# Altium PCB HEXPAD1.PcbDoc
Units mm, origin at the board's own origin, x right, y up, seen from the top; angles counter-clockwise.
Board outline 168.1 x 142.58 mm, 2 copper layers (Top Layer, Bottom Layer), stack 1.74 mm thick; 20 components, 21 nets, 74 pads, 7 vias.
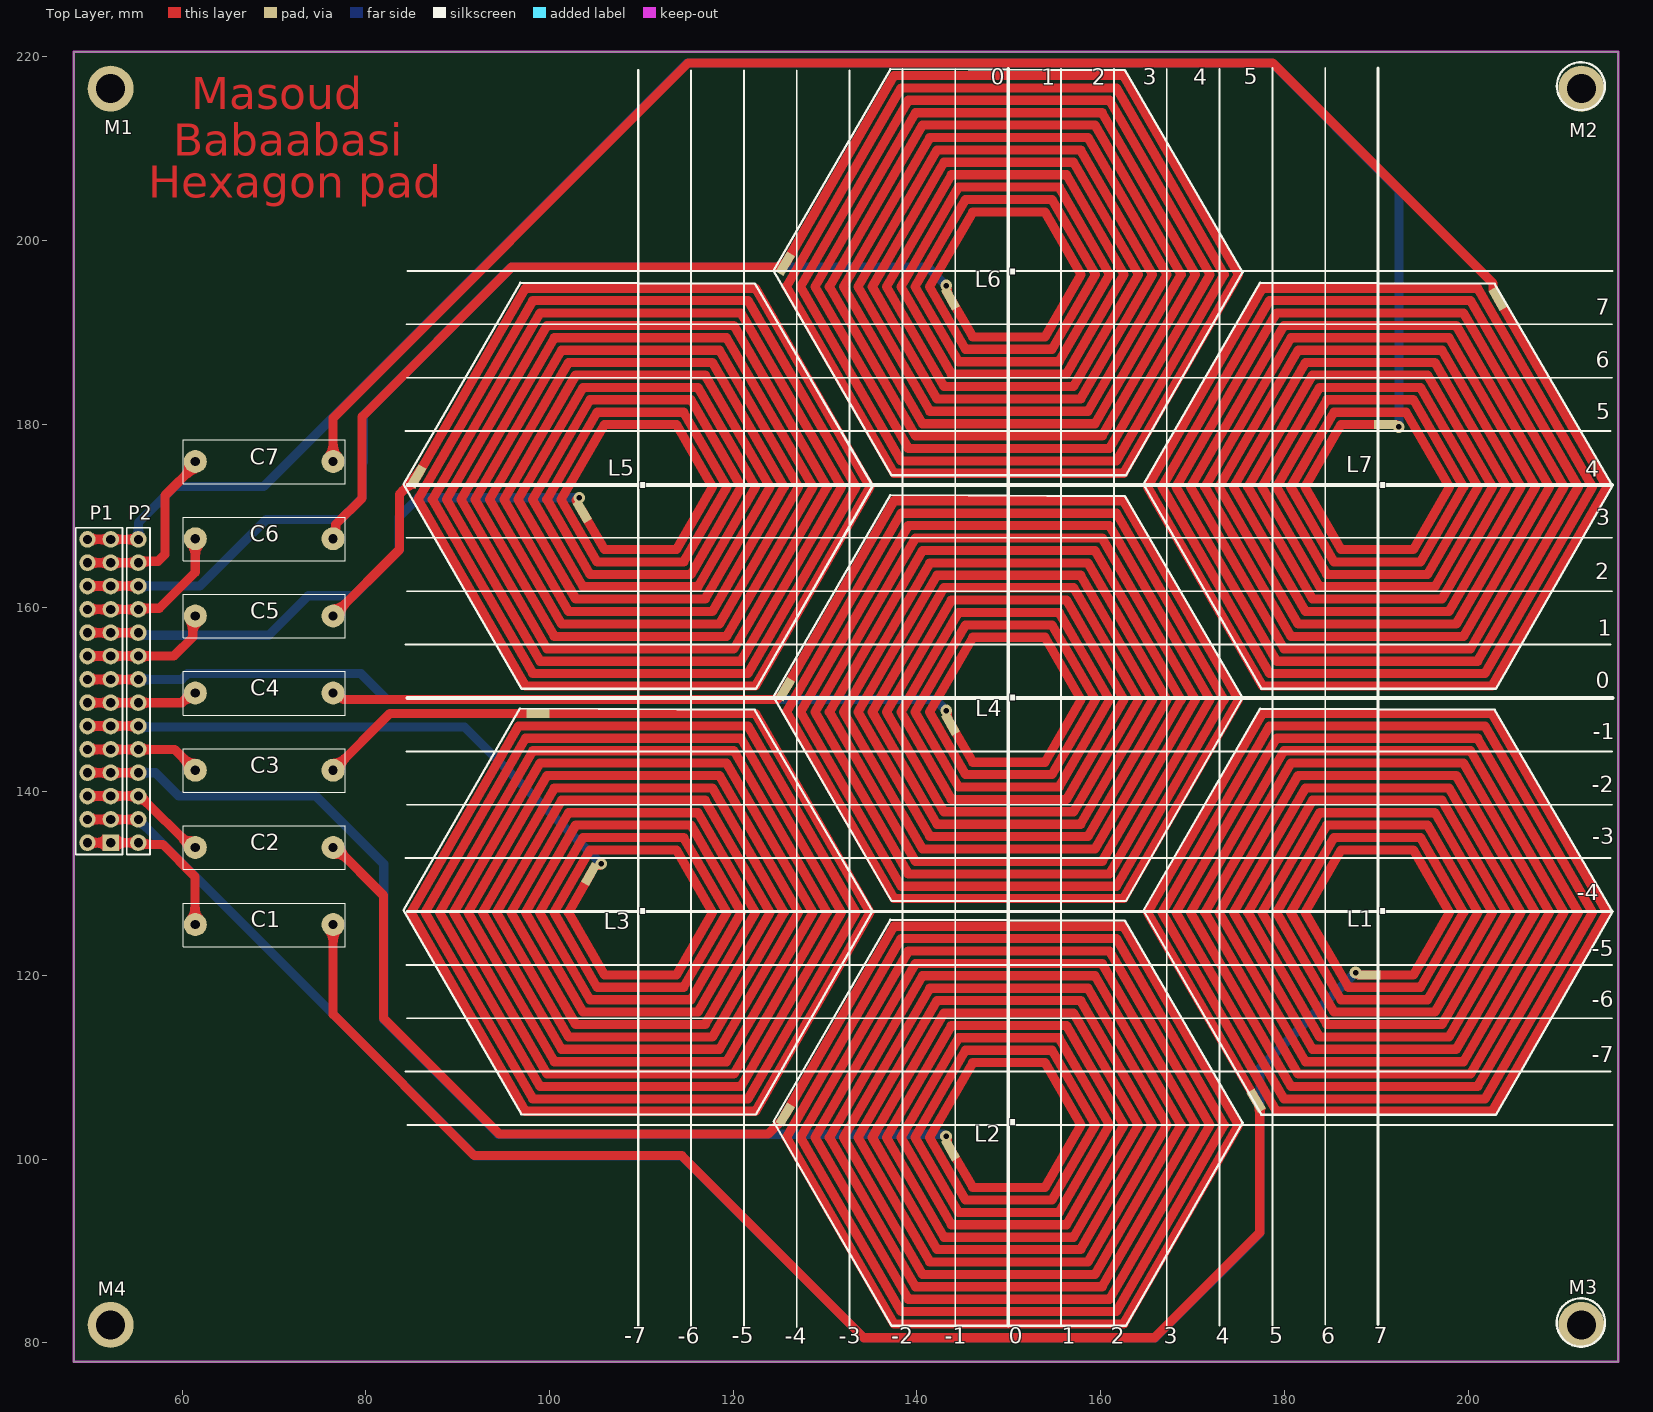
[diagram p0: Top Layer view]
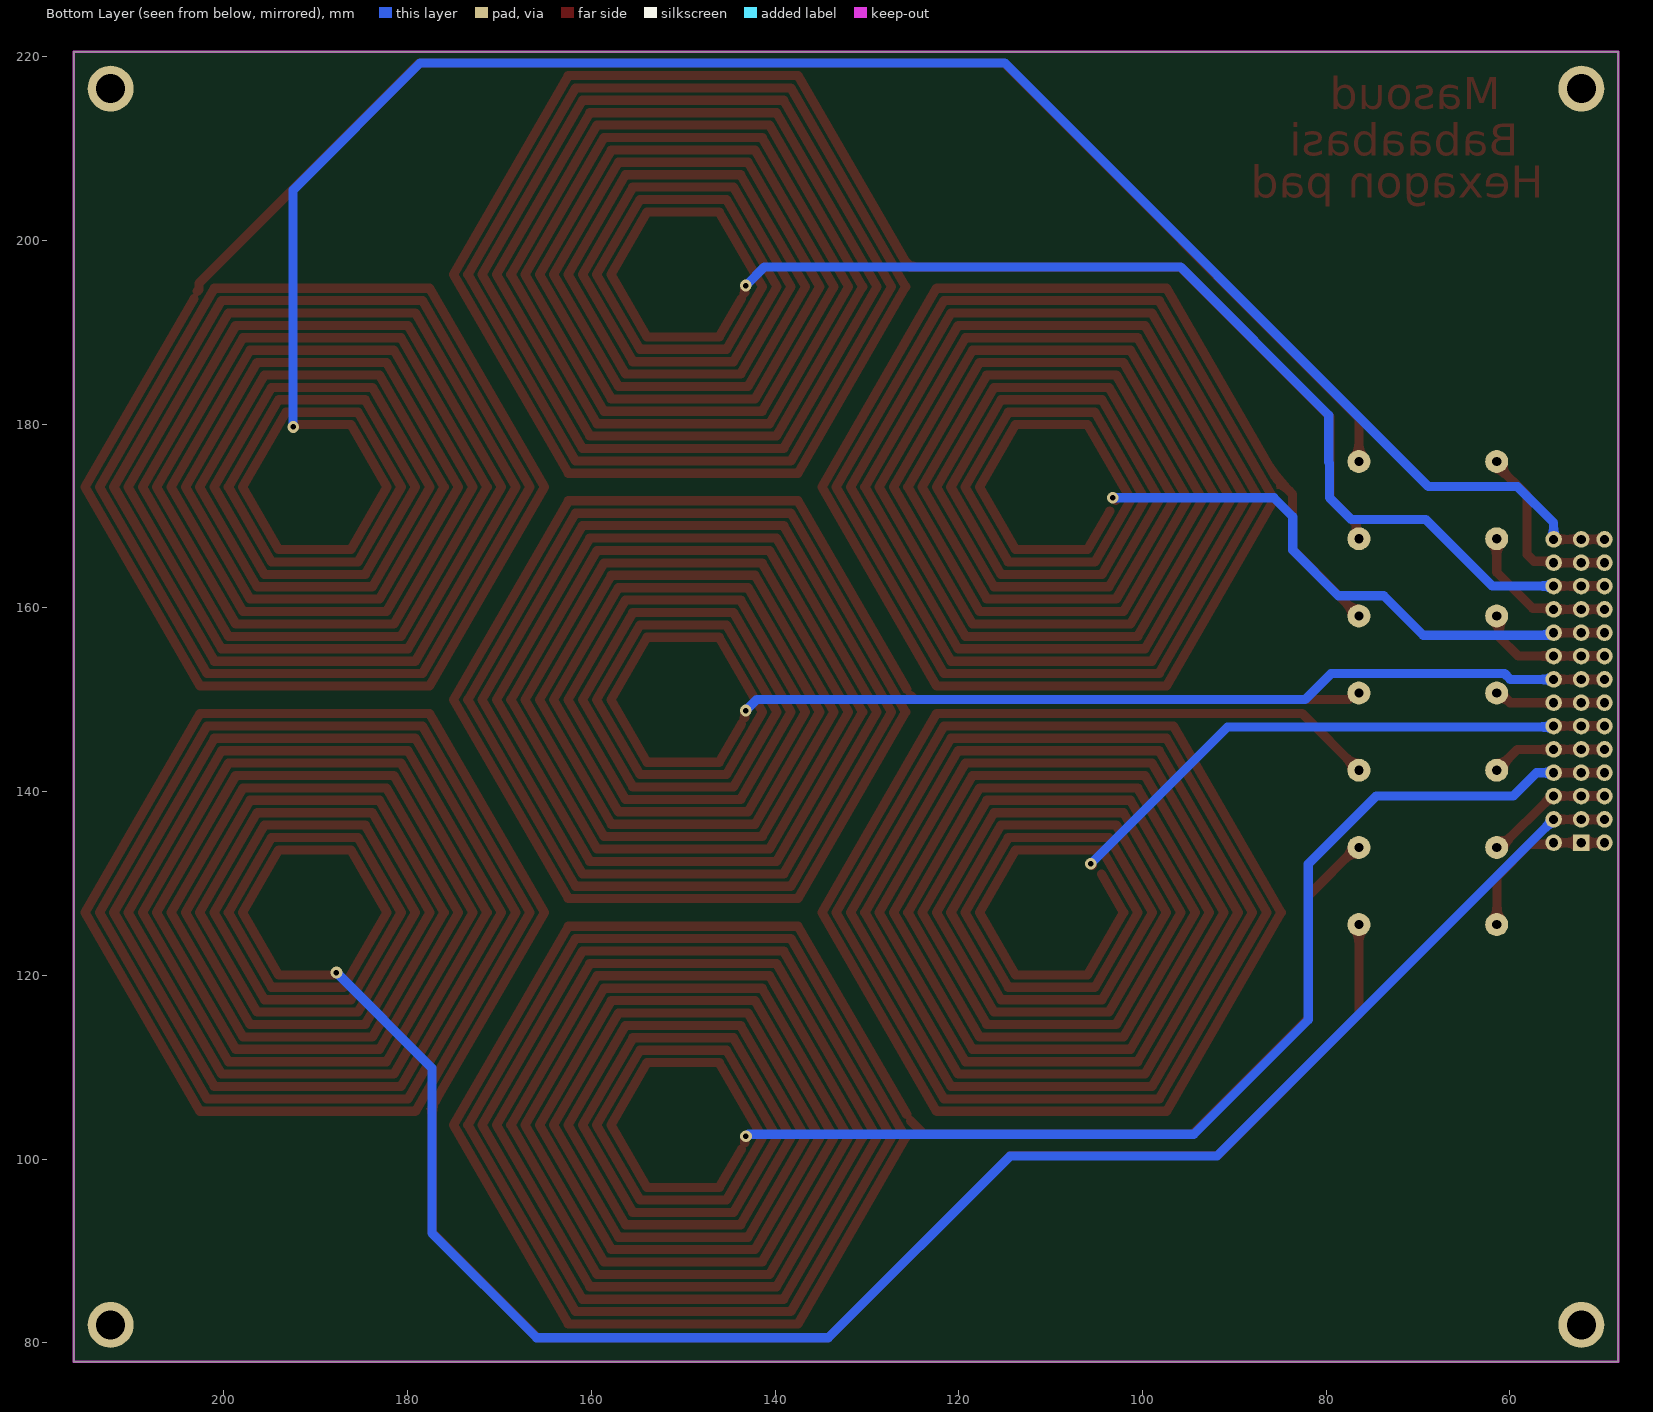
[diagram p1: Bottom Layer view, seen from below]

## Layer stack, top to bottom
Top Solder: solder mask 0.0102, Solder Resist, Dk 3.5
Top Layer: signal copper 0.07
Dielectric 1: dielectric 1.6, FR-4, Dk 4.8
Bottom Layer: signal copper 0.07
Bottom Solder: solder mask 0.0102, Solder Resist, Dk 3.5

## Board outline
48.225,77.95 48.225,220.525 216.325,220.525 216.325,77.95

## Design rules (kind name [scope] priority, off if disabled: settings)
Clearance [All] p1: gap=0.35 ignorepadtopadclearanceinfootprint=FALSE except(0: Arc-Hole Track-Hole SMDPad-Hole THPad-Hole Via-Hole Fill-Hole Poly-Hole Region-Hole Text-Hole; 0.254: Text-Text)
PolygonConnect [All] p1: connectstyle=Relief reliefconductorwidth=0.254 reliefentries=4 polygonreliefangle="90 Angle" airgapwidth=0.254
RoomDefinition HEX1 [InComponentClass('HEX1')] p1 off: confinementstyle=ConfineIn formatcopy=TRUE lockcomponents=FALSE outline 296.865,83.775 354.65,83.775 354.65,137.877 296.865,137.877
RoutingVias [All] p1: holewidth=0.711 width=1.27 viastyle="Through Hole" minholewidth=0.6 minwidth=1.27 maxholewidth=1 maxwidth=22
SolderMaskExpansion [All] p1: expansion=0.102 istentingtop=FALSE
Width [All] p1: maxlimit=2 minlimit=0.254 preferedwidth=1
30 further rules are at their usual default settings.

## Components (designator, comment, footprint, x,y, rotation, side; value= is the part's Value field where it differs from the comment)
C1 "Cap" CAP_MKT 61.45,125.525 r0 top value=100pF
C2 "Cap" CAP_MKT 61.45,133.925 r0 top value=100pF
C3 "Cap" CAP_MKT 61.45,142.325 r0 top value=100pF
C4 "Cap" CAP_MKT 61.45,150.725 r0 top value=100pF
C5 "Cap" CAP_MKT 61.45,159.125 r0 top value=100pF
C6 "Cap" CAP_MKT 61.45,167.525 r0 top value=100pF
C7 "Cap" CAP_MKT 61.45,175.925 r0 top value=100pF
L1 "Inductor" HEXAGON_50-15 190.098,126.85 r120 top locked net-tie value=8uH
L2 "Inductor" HEXAGON_50-15 150,103.699 r60 top locked net-tie value=8uH
L3 "Inductor" HEXAGON_50-15 109.902,126.85 r0 top locked net-tie value=8uH
L4 "Inductor" HEXAGON_50-15 150,150 r60 top locked net-tie value=8uH
L5 "Inductor" HEXAGON_50-15 109.902,173.15 r60 top locked net-tie value=8uH
L6 "Inductor" HEXAGON_50-15 150,196.301 r60 top locked net-tie value=8uH
L7 "Inductor" HEXAGON_50-15 190.098,173.15 r300 top locked net-tie value=8uH
M1 "Screw" "BOARD SCREW 1"#1 52.225,216.525 r0 top
M2 "Screw" "BOARD SCREW 1"#1 212.325,216.525 r0 top
M3 "Screw" "BOARD SCREW 1"#1 212.325,81.95 r0 top
M4 "Screw" "BOARD SCREW 1"#2 52.225,81.95 r0 top
P1 "Header 14X2" HDR2X14 52.25,134.435 r90 top
P2 "Header 14" HDR1X14 55.25,134.435 r90 top

## Footprints (in the part's own frame and the unit in brackets; to place one, negate y for a bottom-side part, rotate by r counter-clockwise, add the part's x,y. Pads: shape width x height; smd on the part's side, far side on the other; paste and mask are expansions set on the pad)
"BOARD SCREW 1"#1 [mm]
  round 5 hole 3.15 mask+0.1: S(0,0)
  body extent -2.67,-2.64 2.69,2.72, height 2.34
"BOARD SCREW 1"#2 [mm]
  round 5 hole 3.15 mask+0.1: *(0,0)
  body extent -2.67,-2.64 2.69,2.72, height 2.34
CAP_MKT [mm]
  round 2.5 hole 1: 1(0,0) 2(15,0)
  silkscreen extent -1.29,-2.4 16.3,2.35
HDR1X14 [mm] "Connector; Header; 14 Position"
  round 1.8 hole 1: 1(0,0) 2(2.54,0) 3(5.08,0) 4(7.62,0) 5(10.16,0) 6(12.7,0) 7(15.24,0) 8(17.78,0) 9(20.32,0) 10(22.86,0) 11(25.4,0) 12(27.94,0) 13(30.48,0) 14(33.02,0)
  silkscreen extent -1.27,-1.27 34.29,1.27
HDR2X14 [mm] "Connector; Header; 14x2 Position"
  rect 1.8x1.8 hole 1: 1(0,0)
  round 1.8 hole 1: 2(0,2.54) 3(2.54,0) 4(2.54,2.54) 5(5.08,0) 6(5.08,2.54) 7(7.62,0) 8(7.62,2.54) 9(10.16,0) 10(10.16,2.54) 11(12.7,0) 12(12.7,2.54) 13(15.24,0) 14(15.24,2.54) 15(17.78,0) 16(17.78,2.54) 17(20.32,0) 18(20.32,2.54) 19(22.86,0) 20(22.86,2.54) 21(25.4,0) 22(25.4,2.54) 23(27.94,0) 24(27.94,2.54) 25(30.48,0) 26(30.48,2.54) 27(33.02,0) 28(33.02,2.54)
  silkscreen extent -1.27,-1.27 34.29,3.81
HEXAGON_50-15 [mm]
  rect 2.5x1 smd mask+0.102: 1(-11.176,21.651)
  rect 2.5x1 smd rot 60 mask+0.102: 2(-5.44,4.179)
  Top Layer lines w1: -11.176,21.651 12.5,21.651 25,0 12.5,-21.651 -12.5,-21.651 -25,0 -13.279,20.301 11.721,20.301 23.441,0 11.721,-20.301 -11.721,-20.301 -23.441,0 -12.5,18.951 10.941,18.951 21.882,0 10.941,-18.951 -10.941,-18.951 -21.882,0 -11.721,17.601 10.162,17.601 20.323,0 10.162,-17.601 -10.162,-17.601 -20.323,0 -10.941,16.251 9.382,16.251 18.765,0 9.382,-16.251 -9.382,-16.251 -18.765,0 -10.162,14.901 8.603,14.901 17.206,0 8.603,-14.901 -8.603,-14.901 -17.206,0 -9.382,13.551 7.823,13.551 15.647,0 7.823,-13.551 -7.823,-13.551 -15.647,0 -8.603,12.201 7.044,12.201 14.088,0 7.044,-12.201 -7.044,-12.201 -14.088,0 -7.823,10.851 6.265,10.851 12.529,0 6.265,-10.851 -6.265,-10.851 -12.529,0 -7.044,9.501 5.485,9.501 10.97,0 5.485,-9.501 -5.485,-9.501 -10.97,0 -6.265,8.151 4.706,8.151 9.412,0 4.706,-8.151 -4.706,-8.151 -9.412,0 -5.485,6.801 3.926,6.801 7.853,0 3.926,-6.801 -3.926,-6.801 -7.853,0 -5.44,4.179

## Part data
C1 C2 C3 C4 C5 C6 C7: "Capacitor", LatestRevisionDate=17-Jul-2002, LatestRevisionNote="Re-released for DXP Platform.", PackageDescription="Radial Cap, Thru-Hole; 2 Leads; 0.3 in Pin Spacing", PackageReference=RAD-0.3, Published=8-Jun-2000, Publisher="Altium Limited"
M1 M2 M3 M4: library part "Board Screw", "Board Screw With Spacer"
P1: "Header, 14-Pin, Dual row", LatestRevisionDate=17-Jul-2002, LatestRevisionNote="Re-released for DXP Platform.", Publisher="Altium Limited"
P2: "Header, 14-Pin", LatestRevisionDate=17-Jul-2002, LatestRevisionNote="Re-released for DXP Platform.", Publisher="Altium Limited"
L1 L2 L3 L4 L5 L6 L7: Code_IEC=1005, Code_JEITA=0402, LatestRevisionDate=29-May-2009, LatestRevisionNote="IPC-7351 Footprint Added.", PackageDescription="Chip Inductor", PackageReference=0402-A, Published=8-Jun-2000, Publisher="Altium Limited"

## Via types
v1: diameter 1.27, hole 0.6, Top Layer to Bottom Layer, tented both sides, 7 vias

## Nets (pads, with @x,y where several pads share a name; then routed paths per layer and width w, separated by ;. In a path a pad name is that pad's centre, name@x,y a point inside that pad or via, vN(x,y) a via of type N, cw(c..) or ccw(c..) an arc to the next point about the centre after c; other vN are vias at no path point)
NetC1_1: C1.1 P1.1 P1.2 P2.1 | length 18.5
  Top Layer w1: P1.2 P1.1 P2.1 55.403,134.282 55.969,134.282 55.994,134.257 57.893,134.257 61.41,130.74 61.41,125.565 C1.1
NetC1_2: C1.2 L1.1 | length 143.6
  Top Layer w1: C1.2 76.45,115.75 91.825,100.375 114.4,100.375 134.225,80.55 165.85,80.55 177.311,92.011 L1.1@177.311,105.65
NetC2_1: C2.1 P1.5 P1.6 P2.3 | length 14.1
  Top Layer w1: P1.6 P1.5 P2.3 55.466,139.515 61.056,133.925 C2.1
NetC2_2: C2.2 L2.1 | length 70.2
  Top Layer w1: C2.2 76.7,133.925 81.925,128.7 81.925,115.325 94.525,102.725 123.8,102.725 L2.1@125.25,104.175
NetC3_1: C3.1 P1.9 P1.10 P2.5 | length 12.7
  Top Layer w1: P1.10 P1.9 P2.5 59.18,144.595 C3.1
NetC3_2: C3.2 L3.1 | length 24.8
  Top Layer w1: C3.2 82.626,148.501 L3.1
NetC4_1: C4.1 P1.13 P1.14 P2.7 | length 12.2
  Top Layer w1: P1.14 P1.13 P2.7 59.994,149.675 61.044,150.725 C4.1
NetC4_2: C4.2 L4.1 | length 49.3
  Top Layer w1: C4.2 76.856,150.725 77.556,150.025 124.8,150.025 L4.1@125.25,150.475
NetC5_1: C5.1 P1.17 P1.18 P2.9 | length 14.7
  Top Layer w1: P1.18 P1.17 P2.9 59.105,154.755 61.163,156.813 61.163,158.838 C5.1
NetC5_2: C5.2 L5.1 | length 18.7
  Top Layer w1: C5.2 83.675,166.35 83.675,172.375 84.764,173.464 84.799,173.464 85.425,174.09 L5.1@85.425,174.125
NetC6_1: C6.1 P1.21 P1.22 P2.11 | length 17.1
  Top Layer w1: P1.22 P1.21 P2.11 55.365,159.95 57.525,159.95 61.45,163.875 C6.1
NetC6_2: C6.2 L6.1 | length 67.5
  Top Layer w1: C6.2 76.737,167.812 76.737,169.087 79.6,171.95 79.6,180.8 95.873,197.073 125.287,197.073 L6.1
NetC7_1: C7.1 P1.25 P1.26 P2.13 | length 20.3
  Top Layer w1: P1.26 P1.25 P2.13 55.403,165.068 57.393,165.068 58.15,165.825 58.15,172.225 61.45,175.525 C7.1
NetC7_2: C7.2 L7.1 | length 157.9
  Top Layer w1: C7.2 76.45,180.675 115.1,219.325 178.7,219.325 202.702,195.323 202.702,194.645 L7.1@202.885,194.462
NetL1_2: L1.2 P1.3 P1.4 P2.2 | length 190
  Top Layer w1: P1.4 P1.3 P2.2 ; v1(187.737,120.308) 187.81,120.308 188.069,120.049 L1.2
  Bottom Layer w1: P2.2 91.9,100.325 114.425,100.325 134.2,80.55 165.95,80.55 177.35,91.95 177.35,109.922 v1(187.737,120.308)
NetL2_2: L2.2 P1.7 P1.8 P2.4 | length 120.5
  Top Layer w1: P1.8 P1.7 P2.4 ; v1(143.161,102.486) 143.161,102.413 143.286,102.288 L2.2@143.286,101.775
  Bottom Layer w1: P2.4 57.12,142.055 59.65,139.525 74.55,139.525 81.95,132.125 81.95,115.175 94.425,102.7 142.874,102.7 143.088,102.486 v1(143.161,102.486)
NetL3_2: L3.2 P1.11 P1.12 P2.6 | length 62.4
  Top Layer w1: P1.12 P1.11 P2.6 ; v1@105.43,131.97 v1(105.625,132.166)
  Bottom Layer w1: P2.6 55.36,147.025 90.766,147.025 v1(105.625,132.166)
NetL4_2: L4.2 P1.15 P1.16 P2.8 | length 96.3
  Top Layer w1: P1.16 P1.15 P2.8 ; v1(143.184,148.826) 143.184,148.753 143.286,148.652 143.286,148.064 L4.2@143.35,148
  Bottom Layer w1: P2.8 59.97,152.215 60.605,152.85 79.475,152.85 82.3,150.025 141.986,150.025 v1(143.184,148.826)
NetL5_2: L5.2 P1.19 P1.20 P2.10 | length 62.4
  Top Layer w1: P1.20 P1.19 P2.10 ; v1@102.91,171.71 103.177,171.977 v1(103.238,171.977)
  Bottom Layer w1: P2.10 55.403,157.142 55.969,157.142 56.086,157.025 69.45,157.025 73.75,161.325 78.675,161.325 83.65,166.3 83.65,169.925 85.702,171.977 v1(103.238,171.977)
NetL6_2: L6.2 P1.23 P1.24 P2.12 | length 114.8
  Top Layer w1: P1.24 P1.23 P2.12 ; v1(143.175,195.083) 143.227,195.031 143.227,194.748 143.286,194.689 143.286,194.339 L6.2@143.375,194.25
  Bottom Layer w1: P2.12 61.925,162.375 69.175,169.625 77.275,169.625 79.65,172 79.65,175.8 79.725,175.875 79.725,180.975 95.85,197.1 141.158,197.1 v1(143.175,195.083)
NetL7_2: L7.2 P1.27 P1.28 P2.14 | length 198.4
  Top Layer w1: P1.28 P1.27 P2.14 ; L7.2 192.127,179.951 192.386,179.692 v1(192.459,179.692)
  Bottom Layer w1: P2.14 55.25,169.275 59.175,173.2 68.875,173.2 115,219.325 178.625,219.325 192.459,205.491 v1(192.459,179.692)
pads on no net: M1.S M2.S M3.S M4.*

## Keep-outs
Keep-Out Layer:
  the board outline again, w0.254

## Other copper
Top Layer:
  text "Masoud" at 61.005,213.122 h6
  text "Babaabasi" at 59.068,208.097 h6
  text "Hexagon pad" at 56.325,203.522 h6

## Silkscreen, mask and mechanical layers (free items; w line width, h text height)
Top Overlay:
  lines w0.2: 84.32,109.523 215.511,109.523 ; 84.32,132.764 215.511,132.764 ; 84.32,156.005 215.511,156.005 ; 84.32,179.246 215.511,179.246 ; 84.445,121.143 215.636,121.143 ; 84.445,144.384 215.636,144.384 ; 84.445,167.625 215.636,167.625 ; 84.445,190.866 215.636,190.866 ; 84.495,115.333 215.686,115.333 ; 84.495,138.574 215.686,138.574 ; 84.495,161.815 215.686,161.815 ; 84.495,185.056 215.686,185.056 ; 84.52,103.712 215.711,103.712 ; 84.52,150.194 215.711,150.194 ; 84.52,196.676 215.711,196.676 ; 115.409,81.739 115.409,218.518 ; 121.161,81.739 121.161,218.518 ; 126.914,81.739 126.914,218.518 ; 132.667,81.739 132.667,218.518 ; 138.42,81.739 138.42,218.518 ; 138.42,81.868 138.42,218.647 ; 144.172,81.868 144.172,218.647 ; 149.925,81.868 149.925,218.647 ; 155.678,81.868 155.678,218.647 ; 161.431,81.868 161.431,218.647 ; 167.183,81.868 167.183,218.647 ; 172.936,81.868 172.936,218.647 ; 178.689,81.868 178.689,218.647 ; 178.689,81.998 178.689,218.777 ; 184.442,81.998 184.442,218.777
  lines w0.254: 214.872,216.857 ccw(c212.264,216.788) 214.872,216.741 ; 214.898,82.132 cw(c212.264,82.213) 214.899,82.213 ; 84.106,127.085 96.806,149.056 122.333,148.929 135.16,126.958 122.46,104.86 96.933,104.86 84.106,127.085 ; 84.131,173.435 96.831,195.406 122.358,195.279 135.185,173.308 122.485,151.21 96.958,151.21 84.131,173.435 ; 124.398,104.093 137.225,81.868 162.752,81.868 175.452,103.966 162.625,125.937 137.098,126.064 124.398,104.093 ; 124.398,150.321 137.098,172.292 162.625,172.165 175.452,150.194 162.752,128.096 137.225,128.096 124.398,150.321 ; 124.398,196.676 137.098,218.647 162.625,218.52 175.452,196.549 162.752,174.451 137.225,174.451 124.398,196.676 ; 164.656,127.06 177.356,149.031 202.883,148.904 215.71,126.933 203.01,104.835 177.483,104.835 164.656,127.06 ; 164.657,173.435 177.484,151.21 203.011,151.21 215.711,173.308 202.884,195.279 177.357,195.406 164.657,173.435
  lines w0.3: 84.52,173.308 215.711,173.308 ; 109.656,81.739 109.656,218.518 ; 190.194,81.998 190.194,218.777 ; 84.52,126.953 215.711,126.953 84.52,126.953 ; 84.52,173.435 215.711,173.435 84.52,173.435
  lines w0.4: 84.52,150.194 215.711,150.194 ; 149.925,81.868 149.925,218.647
  text "5" at 175.579,216.392 h3
  text "0" at 148.02,216.356 h3
  text "1" at 153.532,216.356 h3
  text "2" at 159.044,216.356 h3
  text "3" at 164.555,216.356 h3
  text "4" at 170.067,216.356 h3
  text "." at 149.617,196.241 h3.81
  text "7" at 213.878,191.286 h3
  text "6" at 213.876,185.556 h3
  text "5" at 213.921,179.956 h3
  text "4" at 212.75,173.7 h3
  text "." at 109.35,173 h3.81
  text "." at 189.876,173 h3.81
  text "3" at 213.932,168.406 h3
  text "2" at 213.85,162.525 h3
  text "1" at 214.09,156.376 h3
  text "0" at 213.862,150.635 h3
  text "." at 149.617,149.886 h3.81
  text "-1" at 213.535,145.125 h3
  text "-2" at 213.425,139.325 h3
  text "-3" at 213.482,133.681 h3
  text "-4" at 211.8,127.575 h3
  text "." at 109.325,126.65 h3.81
  text "." at 189.875,126.625 h3.81
  text "-5" at 213.46,121.481 h3
  text "-6" at 213.422,115.956 h3
  text "-7" at 213.432,109.961 h3
  text "." at 149.617,103.658 h3.81
  text "-7" at 108.125,79.342 h3
  text "-5" at 119.817,79.342 h3
  text "5" at 178.326,79.342 h3
  text "7" at 189.725,79.342 h3
  text "-6" at 113.961,79.306 h3
  text "-4" at 125.597,79.306 h3
  text "-3" at 131.464,79.306 h3
  text "-2" at 137.2,79.306 h3
  text "-1" at 143.05,79.306 h3
  text "0" at 149.98,79.306 h3
  text "1" at 155.751,79.306 h3
  text "2" at 161.067,79.306 h3
  text "3" at 166.864,79.306 h3
  text "4" at 172.497,79.306 h3
  text "6" at 183.981,79.306 h3